# Altium PCB PCB_RIGHT_AV-RK MK II_2023-07-27.pcbdoc
Units mil, origin at the board's own origin, x right, y up, seen from the top; angles counter-clockwise.
Board outline 8365.53 x 6307.47 mil, 2 copper layers (Top Layer, Bottom Layer); 62 components, 57 nets, 291 pads, 114 vias.
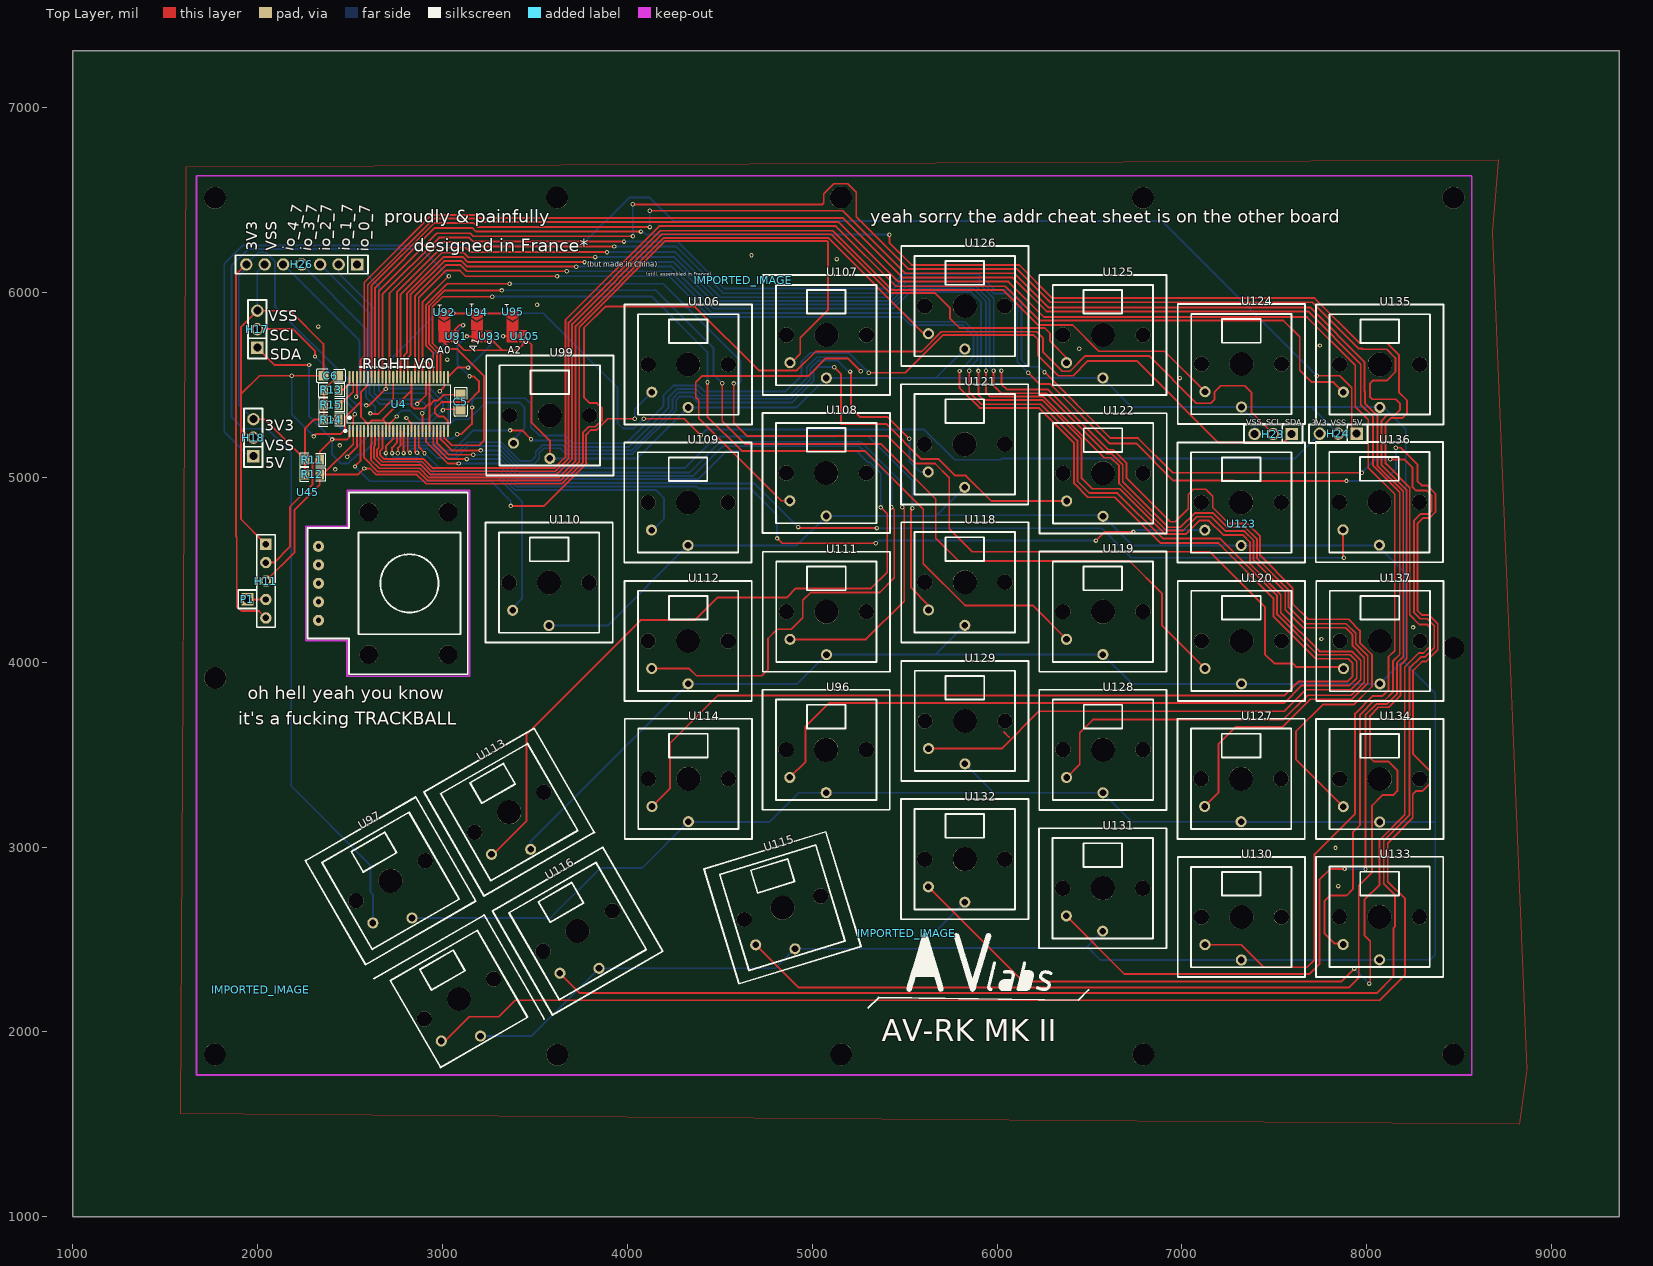
[diagram p0: Top Layer view]
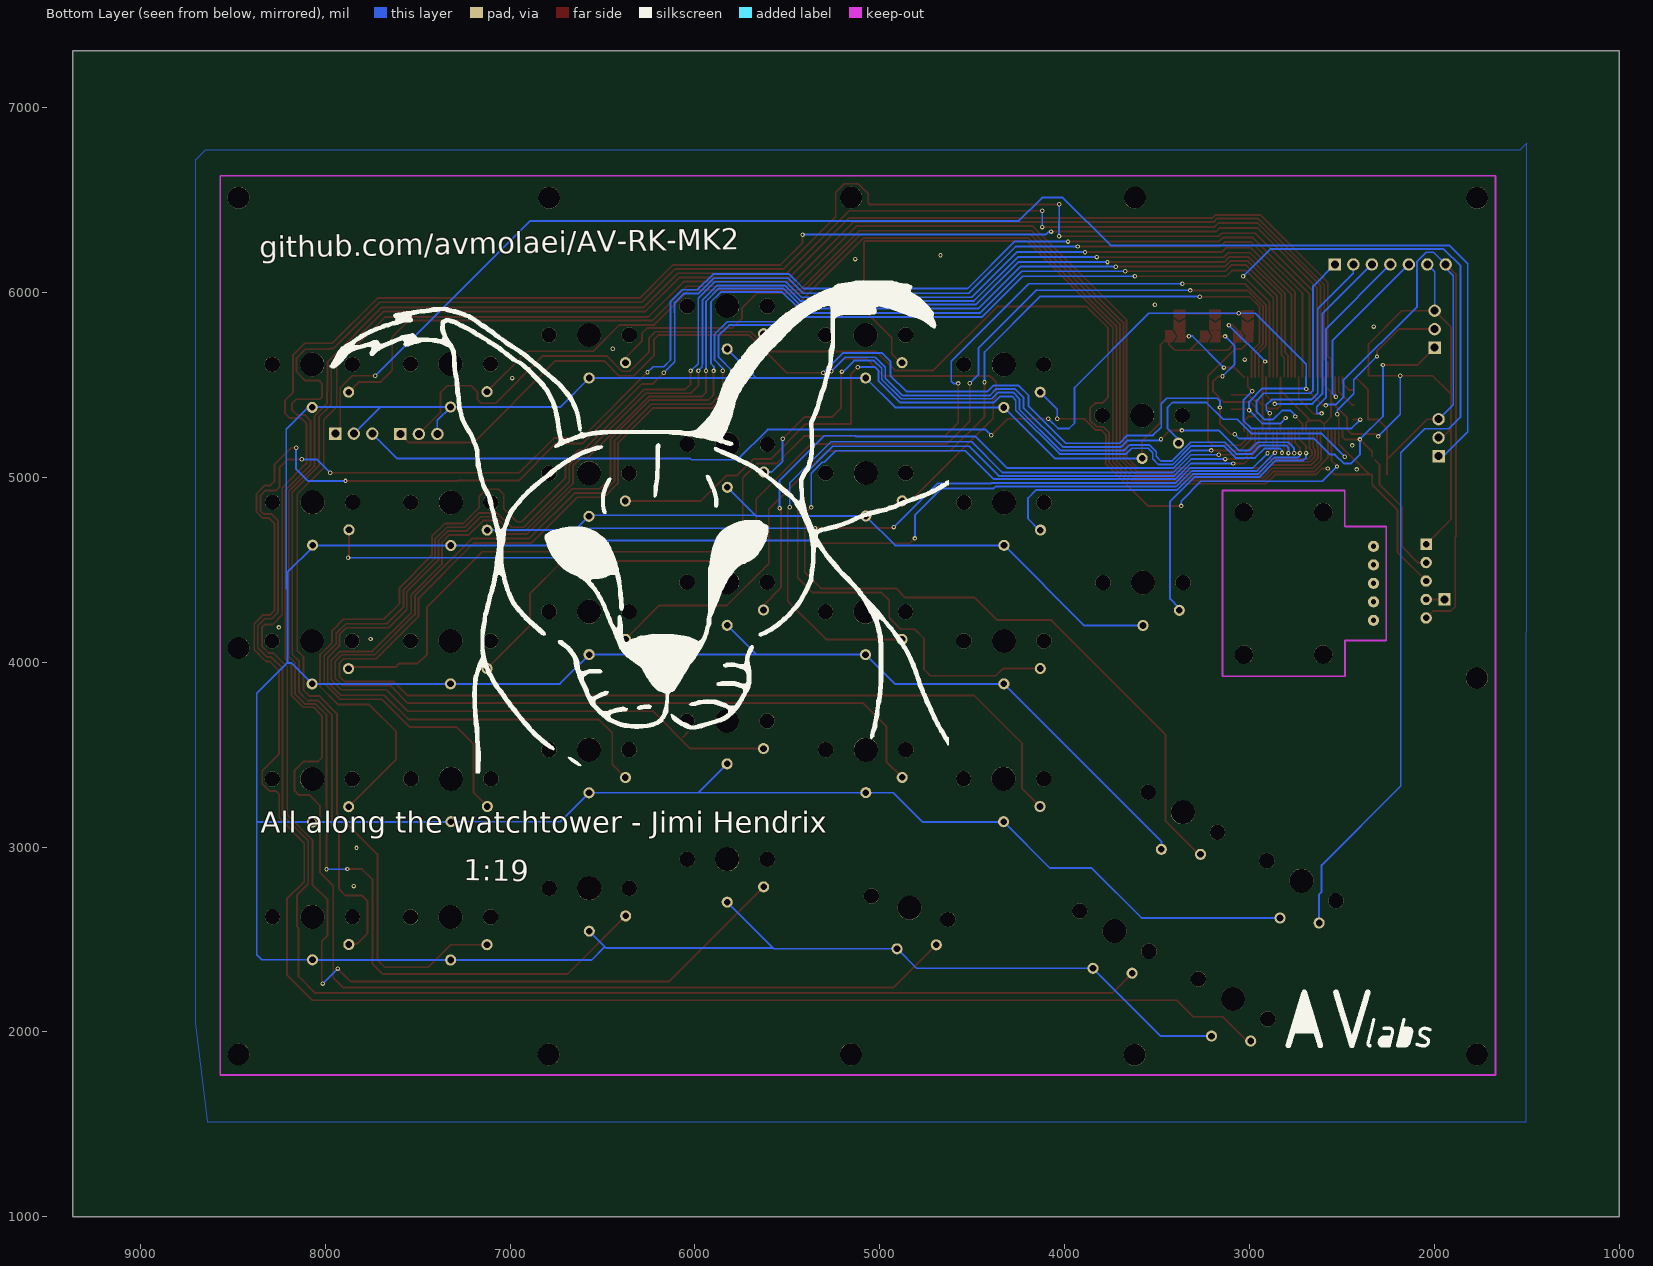
[diagram p1: Bottom Layer view, seen from below]

## Layer stack, top to bottom
Top Layer: signal copper (thickness not stored)
Dielectric: dielectric 12.6, FR-4, Dk 4.8
Bottom Layer: signal copper (thickness not stored)

## Board outline
9365.53,1000 1000,1000 1000,7307.47 9365.53,7307.47

## Components (designator, comment, footprint, x,y, rotation, side; value= is the part's Value field where it differs from the comment)
C5 "100nF" C0805 3097.83,5407.87 r90 top
C6 "100nF" C0805 2395.07,5549.99 r180 top
H11 "HDR-TH_5P-P2.54-V-M" HDR-TH_5P-P2.54-V-M 2044.29,4439.36 r270 top
H17 "I2C_POGO_L" HDR-TH_3P-P2.54-V-M 1997.83,5801.57 r90 top
H18 "PWR_POGO_L" HDR-TH_3P-P2.54-V-M 1976.57,5214.56 r90 top
H23 "I2C_POGO_R" HDR-TH_3P-P2.54-V-M 7493.88,5234.64 r180 top
H24 "PWR_POGO_R" HDR-TH_3P-P2.54-V-M 7845.85,5236.21 r180 top
H26 "X6511WV-07H-C30D60" HDR-TH_7P-P2.54-V-M 2237.99,6151.96 r180 top
IMPORTED_IMAGE "IMPORTED_IMAGE" IMPORTED_IMAGE 5510.35,2533.18 r0 top
IMPORTED_IMAGE "IMPORTED_IMAGE" IMPORTED_IMAGE 4627.38,6065.32 r0 top
IMPORTED_IMAGE "IMPORTED_IMAGE" IMPORTED_IMAGE 2015.55,2227.95 r0 top
P1 "HEADER MALE 2.54" HDR-TH_1P-P2.54-V-M 1944.68,4340.55 r0 top
R11 "4.7kΩ" R0805 2295.86,5095.66 r180 top
R12 "4.7kΩ" R0805 2295.86,5016.14 r180 top
R13 "1.1kΩ" R0805 2397.83,5473.22 r180 top
R14 "1.1kΩ" R0805 2398.22,5312.59 r180 top
R15 "2kΩ" R0805 2398.22,5391.72 r180 top
U4 "PCA9505DGG,118" TSSOP-56_L14.0-W6.1-P0.50-LS8.1-BL 2762.79,5396.84 r0 top
U45 "Pimoroni Trackball" PIMORONI_TRACKBALL_BASIC 2269.88,4918.89 r0 top
U91 "beautiful-solderbridge" BEAUTIFUL-SOLDER-BRIDGE 3075.39,5762.98 r0 top
U92 "beautiful-solderbridge" BEAUTIFUL-SOLDER-BRIDGE 3009.25,5892.9 r90 top
U93 "beautiful-solderbridge" BEAUTIFUL-SOLDER-BRIDGE 3254.91,5762.98 r0 top
U94 "beautiful-solderbridge" BEAUTIFUL-SOLDER-BRIDGE 3185.62,5894.09 r90 top
U95 "beautiful-solderbridge" BEAUTIFUL-SOLDER-BRIDGE 3378.93,5894.87 r90 top
U96 "TECLA KAILH CHOC BAJO PERFIL 1350 RGB COPY" "TECLA  KAILH CHOC BAJO PERFIL 1350 RGB" 5075.38,3526.37 r0 top
U97 "TECLA KAILH CHOC BAJO PERFIL 1350 RGB COPY" "TECLA  KAILH CHOC BAJO PERFIL 1350 RGB" 2718.7,2817.32 r30 top
U99 "TECLA KAILH CHOC BAJO PERFIL 1350 RGB COPY" "TECLA  KAILH CHOC BAJO PERFIL 1350 RGB" 3580.51,5335.03 r0 top
U105 "beautiful-solderbridge" BEAUTIFUL-SOLDER-BRIDGE 3443.89,5763.77 r0 top
U106 "TECLA KAILH CHOC BAJO PERFIL 1350 RGB COPY" "TECLA  KAILH CHOC BAJO PERFIL 1350 RGB" 4328.93,5610.62 r0 top
U107 "TECLA KAILH CHOC BAJO PERFIL 1350 RGB COPY" "TECLA  KAILH CHOC BAJO PERFIL 1350 RGB" 5076.56,5770.07 r0 top
U108 "TECLA KAILH CHOC BAJO PERFIL 1350 RGB COPY" "TECLA  KAILH CHOC BAJO PERFIL 1350 RGB" 5075.78,5023.22 r0 top
U109 "TECLA KAILH CHOC BAJO PERFIL 1350 RGB COPY" "TECLA  KAILH CHOC BAJO PERFIL 1350 RGB" 4327.75,4864.56 r0 top
U110 "TECLA KAILH CHOC BAJO PERFIL 1350 RGB COPY" "TECLA  KAILH CHOC BAJO PERFIL 1350 RGB" 3576.17,4430.7 r0 top
U111 "TECLA KAILH CHOC BAJO PERFIL 1350 RGB COPY" "TECLA  KAILH CHOC BAJO PERFIL 1350 RGB" 5076.96,4273.22 r0 top
U112 "TECLA KAILH CHOC BAJO PERFIL 1350 RGB COPY" "TECLA  KAILH CHOC BAJO PERFIL 1350 RGB" 4328.53,4115.35 r0 top
U113 "TECLA KAILH CHOC BAJO PERFIL 1350 RGB COPY" "TECLA  KAILH CHOC BAJO PERFIL 1350 RGB" 3360.43,3188.58 r30 top
U114 "TECLA KAILH CHOC BAJO PERFIL 1350 RGB COPY" "TECLA  KAILH CHOC BAJO PERFIL 1350 RGB" 4330.11,3369.29 r0 top
U115 "TECLA KAILH CHOC BAJO PERFIL 1350 RGB COPY" "TECLA  KAILH CHOC BAJO PERFIL 1350 RGB" 4838.77,2671.65 r17 top
U116 "TECLA KAILH CHOC BAJO PERFIL 1350 RGB COPY" "TECLA  KAILH CHOC BAJO PERFIL 1350 RGB" 3730.51,2545.27 r30 top
U118 "TECLA KAILH CHOC BAJO PERFIL 1350 RGB COPY" "TECLA  KAILH CHOC BAJO PERFIL 1350 RGB" 5825.78,4432.28 r0 top
U119 "TECLA KAILH CHOC BAJO PERFIL 1350 RGB COPY" "TECLA  KAILH CHOC BAJO PERFIL 1350 RGB" 6572.62,4273.62 r0 top
U120 "TECLA KAILH CHOC BAJO PERFIL 1350 RGB COPY" "TECLA  KAILH CHOC BAJO PERFIL 1350 RGB" 7322.23,4115.35 r0 top
U121 "TECLA KAILH CHOC BAJO PERFIL 1350 RGB COPY" "TECLA  KAILH CHOC BAJO PERFIL 1350 RGB" 5824.6,5178.73 r0 top
U122 "TECLA KAILH CHOC BAJO PERFIL 1350 RGB COPY" "TECLA  KAILH CHOC BAJO PERFIL 1350 RGB" 6573.41,5022.04 r0 top
U123 "TECLA KAILH CHOC BAJO PERFIL 1350 RGB COPY" "TECLA  KAILH CHOC BAJO PERFIL 1350 RGB" 7321.05,4864.17 r0 top
U124 "TECLA KAILH CHOC BAJO PERFIL 1350 RGB COPY" "TECLA  KAILH CHOC BAJO PERFIL 1350 RGB" 7322.23,5612.98 r0 top
U125 "TECLA KAILH CHOC BAJO PERFIL 1350 RGB COPY" "TECLA  KAILH CHOC BAJO PERFIL 1350 RGB" 6572.62,5770.07 r0 top
U126 "TECLA KAILH CHOC BAJO PERFIL 1350 RGB COPY" "TECLA  KAILH CHOC BAJO PERFIL 1350 RGB" 5825.78,5926.76 r0 top
U127 "TECLA KAILH CHOC BAJO PERFIL 1350 RGB COPY" "TECLA  KAILH CHOC BAJO PERFIL 1350 RGB" 7320.26,3369.29 r0 top
U128 "TECLA KAILH CHOC BAJO PERFIL 1350 RGB COPY" "TECLA  KAILH CHOC BAJO PERFIL 1350 RGB" 6573.02,3525.98 r0 top
U129 "TECLA KAILH CHOC BAJO PERFIL 1350 RGB COPY" "TECLA  KAILH CHOC BAJO PERFIL 1350 RGB" 5826.17,3682.28 r0 top
U130 "TECLA KAILH CHOC BAJO PERFIL 1350 RGB COPY" "TECLA  KAILH CHOC BAJO PERFIL 1350 RGB" 7321.84,2621.26 r0 top
U131 "TECLA KAILH CHOC BAJO PERFIL 1350 RGB COPY" "TECLA  KAILH CHOC BAJO PERFIL 1350 RGB" 6571.84,2777.16 r0 top
U132 "TECLA KAILH CHOC BAJO PERFIL 1350 RGB COPY" "TECLA  KAILH CHOC BAJO PERFIL 1350 RGB" 5825.38,2934.25 r0 top
U133 "TECLA KAILH CHOC BAJO PERFIL 1350 RGB COPY" "TECLA  KAILH CHOC BAJO PERFIL 1350 RGB" 8069.47,2622.44 r0 top
U134 "TECLA KAILH CHOC BAJO PERFIL 1350 RGB COPY" "TECLA  KAILH CHOC BAJO PERFIL 1350 RGB" 8070.26,3367.71 r0 top
U135 "TECLA KAILH CHOC BAJO PERFIL 1350 RGB COPY" "TECLA  KAILH CHOC BAJO PERFIL 1350 RGB" 8070.65,5611.02 r0 top
U136 "TECLA KAILH CHOC BAJO PERFIL 1350 RGB COPY" "TECLA  KAILH CHOC BAJO PERFIL 1350 RGB" 8068.69,4865.74 r0 top
U137 "TECLA KAILH CHOC BAJO PERFIL 1350 RGB COPY" "TECLA  KAILH CHOC BAJO PERFIL 1350 RGB" 8071.44,4114.95 r0 top
? "" ? 3017.93,4772.15 r0 top
? "" ? 2841.61,4731.82 r0 top
? "" ? 2336.15,4145.12 r0 top

## Footprints (in the part's own frame and the unit in brackets; to place one, negate y for a bottom-side part, rotate by r counter-clockwise, add the part's x,y. Pads: shape width x height; smd on the part's side, far side on the other; paste and mask are expansions set on the pad)
BEAUTIFUL-SOLDER-BRIDGE [mil]
  Top Layer region: -96.46,31.5 -37.4,31.5 -57.09,0 -37.4,-31.5 -96.46,-31.5
  Top Layer region: -47.24,0 -27.56,31.5 11.81,31.5 11.81,-31.5 -27.56,-31.5
C0805 [mm]
  rect 1.41x1.35 smd paste-100 mask+0.051: 1(-1,0) 2(1,0)
  silkscreen extent -1.96,-0.9 1.96,0.9
HDR-TH_1P-P2.54-V-M [mm]
  rect 1.7x1.7 hole 1.1 paste+0 mask+0.051: 1(0,0)
  silkscreen extent -1.27,-1.27 1.27,1.27
HDR-TH_3P-P2.54-V-M [mm]
  rect 1.7x1.7 hole 1.1 paste+0 mask+0.051: 1(-2.54,0)
  round 1.7 hole 1.1 paste+0 mask+0.051: 2(0,0) 3(2.54,0)
  silkscreen extent -4.02,-1.27 4.02,1.27
HDR-TH_5P-P2.54-V-M [mil]
  rect 62x62 hole 35 paste+0 mask+2: 1(-200,0)
  round 62 hole 35 paste+0 mask+2: 2(-100,0) 3(0,0) 4(100,0) 5(200,0)
  silkscreen extent -250,-50 250,50
HDR-TH_7P-P2.54-V-M [mm]
  rect 1.7x1.7 hole 1.1 paste+0 mask+0.051: 1(-7.62,0)
  round 1.7 hole 1.1 paste+0 mask+0.051: 2(-5.08,0) 3(-2.54,0) 4(0,0) 5(2.54,0) 6(5.08,0) 7(7.62,0)
  silkscreen extent -9.1,-1.27 9.1,1.27
IMPORTED_IMAGE [mil]
  silkscreen extent 0,-315 787,0
PIMORONI_TRACKBALL_BASIC [mil]
R0805 [mil]
  rect 44.59x54.21 smd paste-3937.01 mask+2: 1(-39.37,0) 2(39.37,0)
  silkscreen extent -69,-36 69,36
"TECLA  KAILH CHOC BAJO PERFIL 1350 RGB" [mil]
  round 60 hole 36 paste+0 mask+2: 1(-196.85,-149.65) 2(0,-232.32)
  round 82.68 hole 82.68 unplated paste+0: ""(-216.53,-0.04) ""(216.54,-0.04)
  round 129.92 hole 129.92 unplated paste+0: ""(0,0)
  silkscreen extent -344,-325 344,325
TSSOP-56_L14.0-W6.1-P0.50-LS8.1-BL [mm]
  oval 0.28x1.7 smd paste+0 mask+0.051: 1(-6.75,-3.7) 2(-6.25,-3.7) 3(-5.75,-3.7) 4(-5.25,-3.7) 5(-4.75,-3.7) 6(-4.25,-3.7) 7(-3.75,-3.7) 8(-3.25,-3.7) 9(-2.75,-3.7) 10(-2.25,-3.7) 11(-1.75,-3.7) 12(-1.25,-3.7) 13(-0.75,-3.7) 14(-0.25,-3.7) 15(0.25,-3.7) 16(0.75,-3.7) 17(1.25,-3.7) 18(1.75,-3.7) 19(2.25,-3.7) 20(2.75,-3.7) 21(3.25,-3.7) 22(3.75,-3.7) 23(4.25,-3.7) 24(4.75,-3.7) 25(5.25,-3.7) 26(5.75,-3.7) 27(6.25,-3.7) 28(6.75,-3.7) 29(6.75,3.7) 30(6.25,3.7) 31(5.75,3.7) 32(5.25,3.7) 33(4.75,3.7) 34(4.25,3.7) 35(3.75,3.7) 36(3.25,3.7) 37(2.75,3.7) 38(2.25,3.7) 39(1.75,3.7) 40(1.25,3.7) 41(0.75,3.7) 42(0.25,3.7) 43(-0.25,3.7) 44(-0.75,3.7) 45(-1.25,3.7) 46(-1.75,3.7) 47(-2.25,3.7) 48(-2.75,3.7) 49(-3.25,3.7) 50(-3.75,3.7) 51(-4.25,3.7) 52(-4.75,3.7) 53(-5.25,3.7) 54(-5.75,3.7) 55(-6.25,3.7) 56(-6.75,3.7)
  silkscreen extent -7.49,-3.85 7.08,2.62
? [mil]

## Free pads (board coordinates)
  round 60 hole 28.74 paste+0 mask+2: 1(2328.93,4626.77) 2(2328.93,4526.77) 3(2328.93,4426.77) 4(2328.93,4326.77) 5(2328.93,4226.77)
  round 60 hole 36 paste+0 mask+2: 1(2993.12,1950.32) 2(3204.94,1977.15)
  round 118.11 hole 118.11 unplated paste+0: ""(1768.7,1877.95) ""(1768.7,6512.59) ""(1770.28,3914.56) ""(3619.88,6513.37) ""(3621.06,1875.98) ""(5154.92,6514.16) ""(5156.49,1877.95) ""(6789.56,6512.98) ""(6791.53,1877.56) ""(8468.69,4076.76) ""(8469.08,1878.35) ""(8469.48,6512.98)
  round 100 hole 100 unplated paste+0: ""(2600.59,4040.94) ""(2600.59,4812.59) ""(3029.72,4040.94) ""(3029.72,4812.59)
  round 82.68 hole 82.68 unplated paste+0: ""(2901.27,2070.05) ""(3276.32,2286.58)
  round 129.92 hole 129.92 unplated paste+0: ""(3088.77,2178.34)

## Via types
v1: diameter 23.98, hole 12.01, Top Layer to Bottom Layer, tented both sides, 114 vias

## Nets (pads, with @x,y where several pads share a name; then routed paths per layer and width w, separated by ;. In a path a pad name is that pad's centre, name@x,y a point inside that pad or via, vN(x,y) a via of type N, cw(c..) or ccw(c..) an arc to the next point about the centre after c; other vN are vias at no path point)
5V_MCU: H18.1 H24.1 | length 8055.2
  Top Layer w10: v1(7729.71,5549.99) 7854.9,5549.99 7919.08,5485.82 7919.08,5262.98 H24.1
  Bottom Layer w10: H18.1 1952.21,5114.55 1819.11,5247.65 1819.11,6155.85 1917.91,6254.75 3751.41,6254.75 4010.01,6513.35 4121.41,6513.35 4247.01,6387.75 6891.91,6387.75 v1(7729.71,5549.99)
A0: U4.27 | length 1052.9
  Top Layer w10: U4.27@3008.81,5251.15 3008.81,5214.55 3049.71,5173.65 3198.71,5173.65 3223.81,5198.75 3223.81,5273.15 ; 3009.21,5825.95 3008.51,5762.95 3008.51,5729.55 3043.91,5694.05 3078.51,5694.05 3223.81,5548.85 3223.81,5235.85
A1: U4.28 | length 945.8
  Top Layer w10: U4.28 3028.54,5306.68 3006.49,5328.73 2978.93,5328.73 2958.07,5349.6 2958.07,5371.25 2994.68,5407.87 3139.56,5407.87 3196.61,5464.91 3196.61,5520.9 3171.84,5545.66 3147.5,5545.66 v1(3145.91,5547.25) ; v1(3131.69,5762.98) 3187.98,5762.98 3185.62,5765.34 3185.62,5827.15
  Bottom Layer w10: v1(3131.69,5762.98) 3080.51,5711.8 3080.51,5612.65 v1(3145.91,5547.25)
A2: U4.29 | length 505.4
  Top Layer w10: U4.29 3080.11,5594.09 v1(3137.99,5594.09) ; v1@3327.75,5764.16 3328.14,5763.77 3376.96,5763.77 3378.93,5765.74 3378.93,5827.94
  Bottom Layer w10: v1(3137.99,5594.09) 3308.06,5764.16 v1@3327.75,5764.16
  other v1: 3327.75,5764.16
INT_PCA: R15.1 U4.55 | length 187.7
  Top Layer w10: R15.1 2444.68,5391.72 2516.72,5463.77 U4.55
IO_0_0: U4.3 U99.1 | length 1471.7
  Top Layer w10: v1(2484.05,5111.8) 2536.41,5164.16 U4.3
  Bottom Layer w10: v1(2484.05,5111.8) 2610.4,5238.15 2991.1,5238.15 3067.12,5314.16 3142.32,5314.16 3233.26,5405.11 3417.12,5405.11 3444.28,5377.94 3444.28,5265.35 3383.65,5204.72 U99.1
IO_0_1: U4.4 U106.1 | length 2296.3
  Top Layer w10: v1(2526.18,5059.05) 2556.1,5088.97 U4.4 ; v1(3369.09,4845.66) 3550.61,4845.65 3780.51,5075.55 3775.41,5080.65 3775.41,5229.15 3802.51,5256.25 3832.51,5256.25 3893.91,5316.95 v1@4039.61,5316.95
  Bottom Layer w10: v1(2526.18,5059.05) 2606.49,4978.73 3262.39,4978.73 3369.09,4872.04 v1(3369.09,4845.66) ; v1(4039.56,5316.92) 4039.56,5368.45 U106.1
IO_0_2: U4.5 U107.1 | length 4415.2
  Top Layer w10: U4.5 2575.81,5106.25 2650.61,5031.45 2871.21,5031.45 2920.41,4982.25 3636.41,4982.25 3739.21,5085.05 3739.21,5812.95 4205.31,6279.15 5079.51,6279.15 5086.01,6272.55 5086.01,5906.65 4935.21,5755.85 4935.21,5667.75 4887.91,5620.45 U107.1@4879.71,5620.45
IO_0_3: U4.7 U126.1 | length 4393.3
  Top Layer w10: U4.7 2615.15,5177.55 2612,5174.4 2612,5094.09 2656.89,5049.2 2876.18,5049.2 2926.18,4999.2 3629.72,4999.2 3719.88,5089.36 3719.88,5818.1 4197.43,6295.66 5085.62,6295.66 5604.17,5777.11 U126.1
IO_0_4: U4.8 U125.1 | length 5260
  Top Layer w10: U4.8 2635.21,5172.85 2628.51,5166.15 2628.51,5106.25 2668.71,5066.15 2884.21,5066.15 2934.21,5016.15 3617.11,5016.15 3700.61,5099.55 3700.61,5829.55 4186.81,6315.75 5103.71,6315.75 5422.61,5996.85 5665.11,5996.85 5744.71,5917.35 5744.71,5860.65 5797.01,5808.25 6257.31,5808.25 6287.21,5778.35 6287.21,5736.25 6375.81,5647.55 U125.1@6375.81,5620.45
IO_0_5: U4.9 U124.1 | length 5984.6
  Top Layer w10: U4.9 2654.51,5160.25 2644.71,5150.35 2644.71,5113.35 2673.81,5084.25 2888.81,5084.25 2939.61,5033.45 3610.81,5033.45 3681.71,5104.35 3681.71,5837.35 4178.51,6334.25 5112.01,6334.25 5433.31,6012.95 6032.91,6012.95 6220.61,5825.15 6408.11,5825.15 6550.61,5682.65 6906.01,5682.65 U124.1@7125.41,5463.35
IO_0_6: U4.10 U135.1 | length 6831.4
  Top Layer w10: U4.10 2674.21,5155.55 2662.01,5143.25 2662.01,5120.85 2682.51,5100.35 2896.21,5100.35 2946.21,5050.35 3604.51,5050.35 3665.11,5111.05 3665.11,5852.75 4171.81,6359.45 5128.11,6359.45 5453.31,6034.25 6045.11,6034.25 6230.91,5848.45 7549.81,5848.45 7637.61,5760.65 7637.61,5579.15 7701.41,5515.35 7819.81,5515.35 U135.1
IO_0_7: H26.1 U4.12 | length 1477.4
  Top Layer w10: U4.12 2713.58,5291.33 v1(2751.77,5329.52)
  Bottom Layer w10: H26.1 2655.31,6034.64 2655.31,5470.45 2670.61,5455.15 2921.41,5455.15 2961.21,5415.35 2961.21,5355.15 2918.31,5312.15 2916.71,5313.75 2871.11,5313.75 2823.81,5361.05 2777.01,5361.05 2751.81,5335.85 v1@2751.81,5329.55
IO_1_0: U4.13 U110.1 | length 1603.7
  Top Layer w10: v1(2693.5,5131.49) 2693.51,5169.25 2733.31,5209.05 U4.13
  Bottom Layer w10: v1(2693.5,5131.49) 2693.51,5107.05 2708.91,5091.75 2856.51,5091.75 2946.61,5001.55 3297.41,5001.55 3428.91,4870.05 3428.91,4342.15 3379.31,4292.55 U110.1
IO_1_1: U4.14 U109.1 | length 1915.2
  Top Layer w10: v1(2726.96,5131.49) 2726.96,5161.02 2752.95,5187 U4.14@2752.95,5251.17
  Bottom Layer w10: v1(2726.96,5131.49) 2726.21,5118.45 2736.81,5107.85 2864.41,5107.85 2954.51,5017.75 3305.31,5017.75 3390.41,4932.65 4153.31,4932.65 4198.21,4887.75 4198.21,4776.35 4136.81,4714.95 U109.1@4130.91,4714.95
IO_1_2: U4.15 U108.1 | length 4952.6
  Top Layer w10: v1(2758.07,5131.1) 2758.07,5158.66 2772.63,5173.22 U4.15 ; v1(3365.51,5253.95) 3431.27,5253.95 v1(3478.54,5206.69) ; U108.1 4832.52,4873.57 4386.41,5319.68 4386.41,5416.92 4370.27,5433.06 4370.27,5514.56 4403.34,5547.63 4977.35,5547.63 5073.81,5644.09 5192.77,5644.09 v1(5262.81,5574.05)
  Bottom Layer w10: v1(2758.07,5131.1) 2758.11,5158.65 2789.21,5189.75 2954.51,5189.75 2998.21,5146.05 3057.71,5146.05 3165.51,5253.95 v1(3365.51,5253.95) ; v1(3478.54,5206.69) 3485.21,5199.95 3658.81,5199.95 3693.91,5164.95 4010.01,5164.95 4223.01,5377.95 4223.01,5432.65 4270.71,5478.75 4368.71,5478.75 4403.71,5443.65 4877.71,5443.65 4970.71,5536.65 4970.71,5595.65 5025.01,5649.95 5186.81,5649.95 v1(5262.81,5574.05)
IO_1_3: U4.16 U121.1 | length 3910.2
  Top Layer w10: v1(2789.17,5131.49) 2789.17,5248.02 U4.16 ; v1@5204.91,5572.45 5209.21,5568.05 5209.21,5377.55 5260.41,5326.35 5407.67,5327.16 ; 5374.49,5326.35 5407.69,5326.35 v1(5525.38,5208.65)
  Bottom Layer w10: v1(2789.17,5131.49) 2789.21,5161.45 2801.01,5173.25 2940.71,5173.25 2987.61,5126.35 3068.71,5126.35 3132.51,5190.15 3317.51,5190.15 3419.91,5087.75 3478.51,5087.75 3504.11,5113.35 3504.11,5138.55 3541.11,5175.55 3647.01,5175.55 3677.01,5145.65 4023.01,5145.65 4244.71,5367.35 4244.71,5425.55 4278.51,5459.45 4359.61,5459.45 4393.91,5425.15 4884.81,5425.15 4989.21,5529.55 4989.21,5589.35 5031.71,5631.85 5138.81,5631.85 5198.21,5572.45 v1@5204.91,5572.45 ; v1(5525.38,5208.65) 5525.81,5087.35 5584.11,5029.05 U121.1
  other v1: 5204.91,5572.43
IO_1_4: U4.17 U122.1 | length 4598.7
  Top Layer w10: U4.17 2812,5144.09 v1(2823.81,5132.28) ; v1@5119.11,5596.45 5156.51,5559.05 5156.51,5288.15 5402.11,5288.15 5591.11,5099.25 5684.41,5099.25 5773.81,5009.85 5831.31,5009.85 5968.71,4872.35 U122.1
  Bottom Layer w10: v1(2823.81,5132.28) 2823.81,5146.05 2834.81,5157.05 2918.01,5157.05 2969.91,5105.15 3074.61,5105.15 3139.51,5170.05 3314.81,5170.05 3415.21,5069.65 3492.71,5069.65 3523.01,5099.95 3523.01,5133.85 3547.01,5157.85 3636.41,5157.85 3667.11,5127.15 4027.31,5127.15 4264.41,5364.15 4264.41,5417.75 4284.41,5437.75 4348.61,5437.75 4380.81,5405.55 4891.11,5405.55 5007.31,5521.65 5007.31,5579.15 5024.61,5596.45 v1@5119.11,5596.45
  other v1: 5119.09,5596.45
IO_1_5: U4.19 U123.1 | length 4696.9
  Top Layer w10: U4.19 2851.37,5133.46 v1(2862,5133.46) ; v1(4810.03,4670.07) 4836.8,4643.3 v1(5344.28,4643.3) ; v1(6534.83,4657.87) 6581.68,4704.72 v1(6737.59,4704.72)
  Bottom Layer w10: v1(2862,5133.46) 2960.81,5034.65 3312.41,5034.65 3396.21,4950.75 4373.01,4950.75 4383.61,4940.15 4665.91,4940.15 4810.01,4796.05 v1(4810.03,4670.07) ; v1(5344.28,4643.3) 5358.85,4657.87 v1(6534.83,4657.87) ; v1(6737.59,4704.72) 6747.38,4714.52 U123.1
IO_1_6: U4.20 U136.1 | length 5494.6
  Top Layer w10: U4.20 2871.05,5165.35 2902.16,5134.25 v1(2902.16,5130.7) ; v1(4925.01,4731.05) 4930.47,4725.58 v1(5350.19,4725.58) ; U136.1 7871.84,4570.42 v1(7876.91,4565.35)
  Bottom Layer w10: v1(2902.16,5130.7) 2982.08,5050.78 3319.09,5050.78 3399.4,4970.47 4393.89,4970.47 4396.65,4967.71 4687.59,4967.71 v1(4925.01,4731.05) ; v1(5350.19,4725.58) 6565.91,4725.15 6725.81,4565.35 v1(7876.91,4565.35)
IO_1_7: H26.2 U4.21 | length 1230
  Top Layer w10: v1(2889.95,5347.24) 2890.74,5346.45 U4.21
  Bottom Layer w10: H26.2 2437.99,6105.11 2630.51,5912.59 2630.51,5455.45 2665.21,5420.85 2880.51,5420.85 2908.81,5392.55 2908.81,5366.05 v1@2890.01,5347.25
IO_2_0: U4.22 U113.1 | length 6314.4
  Top Layer w10: U4.22 2910.43,5192.83 3028.06,5075.19 v1(3087.59,5075.19) ; U113.1 3273.34,2960.55 3454.52,3141.73 3454.52,3610.62 4071.45,4227.55 4363.57,4227.55 4486.02,4349.99 4861.21,4349.99 4910.82,4399.6 5317.9,4399.6 5405.7,4487.4 5405.7,4802.36 v1(5370.66,4837.4)
  Bottom Layer w10: v1(3087.59,5075.19) 3317.51,5075.15 3401.81,4990.95 4383.61,4990.95 4537.21,5144.45 5238.81,5144.45 5301.41,5081.85 5312.01,5081.85 5370.71,5023.25 v1(5370.66,4837.4)
IO_2_1: U4.24 U112.1 | length 5004.2
  Top Layer w10: U4.24 2949.8,5179.16 3029.76,5099.2 v1(3131.29,5099.2) ; U112.1 4334.48,3965.7 4373.81,3926.37 4725.78,3926.37 4760.82,3961.41 4760.82,4128.34 4811.21,4178.73 4886.01,4178.73 4948.61,4241.33 4948.61,4334.64 4991.13,4377.16 5364.75,4377.16 5443.49,4455.9 5443.49,4824.4 v1(5428.93,4838.97)
  Bottom Layer w10: v1@3131.31,5099.25 3316.31,5099.25 3407.31,5008.25 4357.31,5008.25 4517.11,5168.15 5254.51,5168.15 5428.91,4993.65 v1(5428.93,4838.97)
IO_2_2: U4.25 U111.1 | length 4161.4
  Top Layer w10: U4.25 2969.48,5186.98 3034.03,5122.43 v1(3165.55,5122.43) ; U111.1 5290.69,4123.57 5497.82,4330.7 5497.82,4827.48 v1(5486.8,4838.51)
  Bottom Layer w10: v1@3165.51,5122.45 3316.31,5122.45 3412.41,5026.35 4336.81,5026.35 4502.91,5192.55 5264.01,5192.55 5486.81,4969.65 v1@5486.81,4833.45
IO_2_3: U4.26 U118.1 | length 3578.5
  Top Layer w10: U4.26 2989.16,5205.9 3049.01,5146.05 v1(3206.1,5146.06) ; v1(5541.91,4833.05) 5534.83,4825.98 5534.83,4403.14 5628.93,4309.05 U118.1
  Bottom Layer w10: v1(3206.1,5146.06) 3315.91,5146.05 3412.01,5049.95 4310.81,5049.95 4482.91,5222.05 5128.91,5222.05 5132.11,5225.15 5301.01,5225.15 5541.91,4984.25 v1(5541.91,4833.05)
IO_2_4: U4.31 U119.1 | length 4998.1
  Top Layer w10: U4.31 2989.17,5683.46 2945.47,5727.16 2945.47,5922.82 2999.8,5977.15 v1(3268.3,5977.16) ; v1(4433.26,5514.95) 4433.26,5329.13 4619.09,5143.3 5285.66,5143.3 5601.01,4827.95 5601.01,4533.05 5826.61,4307.45 6192.31,4307.45 U119.1
  Bottom Layer w10: v1(3268.3,5977.16) 3270.66,5979.52 4132.08,5979.52 4433.26,5678.34 v1(4433.26,5514.95)
IO_2_5: U4.32 U120.1 | length 5913.7
  Top Layer w10: U4.32 2969.48,5678.38 2927.01,5720.85 2927.01,5927.15 3011.21,6011.45 v1(3320.66,6011.41) ; v1@4513.58,5509.05 4513.58,5303.54 4636.02,5181.1 5370.61,5181.1 5668.71,4882.99 5668.71,4670.85 5791.9,4547.65 6716.7,4547.65 6891.9,4372.45 6891.9,4199.15 U120.1
  Bottom Layer w10: v1(3320.66,6011.41) 4152.94,6012.98 4465.15,5700.78 4465.15,5557.48 v1@4513.58,5509.05
  other v1: 4513.57,5509.05
IO_2_6: U4.33 U137.1 | length 6860.9
  Top Layer w10: U4.33 2949.8,5674.4 2910.82,5713.38 2910.82,5933.85 3024.99,6048.02 v1@3367.91,6048.02 ; v1(4575.78,5508.65) 4575.78,5296.48 4648.6,5223.65 5409.6,5223.65 5558.11,5075.15 5664.4,5075.15 5741.1,4998.45 5741.1,4722.45 5865.9,4597.25 7151.81,4597.25 7449.4,4299.55 7449.4,4044.05 7501.41,3992.15 7601.41,3992.15 7619.91,3973.65 7866.3,3973.65 U137.1@7874.6,3965.35
  Bottom Layer w10: v1(3362.69,6048.05) 4194.68,6048.02 4613.18,5629.52 4613.18,5520.46 4601.37,5508.65 v1(4575.78,5508.65)
IO_2_7: H26.3 U4.35 | length 1256.6
  Top Layer w10: v1(2863.18,5397.24) 2910.43,5444.47 U4.35
  Bottom Layer w10: H26.3 2604.91,5885.04 2604.91,5451.55 2659.21,5397.25 v1@2863.21,5397.25
IO_3_0: U4.36 U97.1 | length 5836.1
  Top Layer w10: U4.36 2890.74,5948.01 3034.84,6092.12 v1@3037.6,6089.35
  Bottom Layer w10: U97.1 2623.04,2743.68 2609.25,2757.48 2609.25,2902.36 2181.3,3330.31 2181.3,5133.46 2051.37,5263.38 1922.24,5263.38 1857.67,5327.94 1857.67,6144.09 1949.01,6235.42 2887.53,6235.42 v1(3034.41,6088.55)
IO_3_1: U4.37 U114.1 | length 11176.5
  Top Layer w10: U4.37 2871.06,5971.25 3018.3,6118.49 3094.28,6118.49 3124.2,6088.57 v1@3621.05,6088.57 ; U114.1@4133.31,3219.65 4230.11,3316.45 4230.11,3560.25 4490.31,3820.45 7556.91,3820.45 7632.91,3896.45 7897.03,3896.45 7923.8,3923.22 7923.8,3994.88 7899.79,4018.89 7725.38,4018.89 7495.46,4248.81 7495.46,4347.24 7198.21,4644.48 6884.83,4644.48 6636.4,4892.91 6491.92,4892.91 6417.11,4967.71 6417.11,5183.46 6224.99,5375.58 5905.3,5375.58 5797.43,5483.45 v1(5797.43,5575.58)
  Bottom Layer w10: v1(3619.88,6088.57) 4226.57,6088.57 4446.65,5868.49 5487.59,5868.49 5532.08,5824.01 5815.15,5824.01 5873.41,5765.74 5873.41,5651.57 v1(5797.43,5575.58)
IO_3_2: U4.38 U96.1 | length 10417.6
  Top Layer w10: U4.38 2851.37,5983.11 3017.11,6148.85 3098.21,6148.85 3131.72,6115.34 v1(3671.84,6115.35) ; U96.1@4878.51,3376.75 4964,3462.15 4964,3653.15 5089.91,3779.15 7552.91,3779.15 7648.6,3874.75 7906.9,3874.75 7945.81,3913.75 7945.81,4004.35 7910.01,4040.15 7733.6,4040.15 7515.11,4258.65 7515.11,4360.25 7205.71,4669.65 6896.21,4669.65 6651.01,4914.95 6500.2,4914.95 6434.81,4980.35 6434.81,5198.85 6237.61,5396.05 5915.11,5396.05 5849.8,5461.36 v1(5849.79,5576.37)
  Bottom Layer w10: v1@3671.81,6115.35 4231.71,6115.35 4458.51,5888.55 5499.01,5888.55 5545.51,5842.15 5825.81,5842.15 5894.31,5773.65 5894.31,5635.85 5849.81,5591.35 v1(5849.79,5576.37)
IO_3_3: U4.40 U129.1 | length 9863.7
  Top Layer w10: U4.40 2812,5646.84 2826.21,5661.05 2826.21,5988.55 3008.11,6170.45 3103.31,6170.45 3133.71,6140.15 v1@3724.61,6140.15 ; U129.1@5629.31,3532.65 6024.91,3532.65 6228.91,3736.65 6230.9,3734.65 7554.91,3734.65 7671.01,3850.75 7912.41,3850.75 7967.51,3905.85 7967.51,4011.05 7919.91,4058.65 7745.11,4058.65 7535.2,4268.45 7535.2,4364.95 7368.71,4531.45 7368.71,4649.95 7328.51,4688.55 7223.8,4688.55 7145.81,4766.53 7093.88,4766.53 7020.26,4692.91 6909.63,4692.91 6664.36,4938.18 6513.97,4938.18 6457.27,4994.88 6457.27,5205.9 6244.28,5418.89 5926.56,5418.89 5899.4,5446.06 v1(5899.4,5575.98)
  Bottom Layer w10: v1(3723.01,6140.15) 4239.61,6140.15 4465.11,5914.55 5439.61,5914.55 5527.71,6002.75 5860.81,6002.75 5913.21,5950.35 5913.21,5614.55 5897.81,5599.25 5897.81,5577.55 v1(5899.4,5575.98)
IO_3_4: U4.41 U128.1 | length 9308.5
  Top Layer w10: U4.41 2792.32,5661.02 2808.46,5677.16 2808.46,5995.66 3005.7,6192.9 3109.24,6192.9 3137.2,6164.95 v1(3767.91,6164.95) ; v1(5940.34,5576.76) 5940.35,5459.01 5962.41,5436.95 6250.2,5436.95 6580.9,5106.25 6615.51,5106.25 6660.01,5061.85 6660.01,4966.95 6914.31,4712.55 7006.1,4712.55 7080.9,4787.35 7158.11,4787.35 7236.41,4709.05 7338.01,4709.05 7388.4,4658.65 7388.4,4551.55 7559.2,4380.75 7559.2,4284.25 7657.31,4186.25 7886.81,4186.25 7923.8,4149.25 7923.8,4088.15 7986.81,4025.15 7986.81,3891.35 7916.7,3821.25 7680.51,3821.25 7549.4,3690.15 6519.51,3690.15 6447.41,3618.15 6447.41,3447.55 U128.1@6376.21,3376.35
  Bottom Layer w10: v1(3767.91,6164.95) 4249.81,6164.55 4478.11,5936.25 5435.61,5936.25 5521.81,6022.45 5870.61,6022.45 5940.31,5952.75 v1(5940.34,5576.76)
IO_3_5: U4.42 U127.1 | length 8732.9
  Top Layer w10: U4.42@2772.61,5542.55 2772.61,5990.55 2997.01,6214.95 3115.51,6214.95 3139.61,6190.95 3826.18,6190.95 v1(3826.17,6192.12) ; v1(5981.29,5577.16) 5981.29,5496.06 6022.23,5455.11 6265.93,5455.11 6593.1,5127.94 6620.21,5127.94 6680.11,5068.15 6680.11,4977.15 6927.31,4729.95 6992.31,4729.95 7072.21,4808.25 7166.7,4808.25 7245.11,4729.95 7341.5,4729.95 7407.31,4664.15 7407.31,4561.05 7576.21,4392.15 7576.21,4299.25 7667.1,4208.25 7888.01,4208.25 7940.31,4155.85 7940.31,4099.25 8005.31,4034.25 8005.31,3885.05 7919.51,3799.25 7695.11,3799.25 7545.51,3649.65 7291.9,3649.65 7197.41,3555.15 7197.41,3293.65 U127.1@7123.4,3219.65
  Bottom Layer w10: v1(3826.17,6192.12) 4252.95,6192.11 4490.35,5954.71 5430.5,5954.71 5514.75,6038.97 5880.5,6038.97 5958.45,5961.01 5958.45,5615.74 5960.42,5613.77 5960.42,5598.02 v1(5981.29,5577.16)
IO_3_6: U4.43 U134.1 | length 8685.2
  Top Layer w10: U4.43@2752.91,5542.55 2752.91,6001.95 2993.51,6242.55 3126.61,6242.55 3150.67,6218.49 v1(3889.56,6218.49) ; v1(6023.81,5576.37) 6023.81,5504.32 6052.15,5475.98 6274.99,5475.98 6601.36,5149.6 6627.74,5149.6 6700.58,5076.77 6700.58,4995.27 6936.01,4759.84 6963.57,4759.84 7034.04,4830.31 7034.04,4907.47 7061.99,4935.43 7128.92,4935.43 7166.72,4897.63 7166.72,4837 7253.33,4750.39 7353.33,4750.39 7423.41,4680.31 7423.41,4577.55 7598.21,4402.75 7598.21,4317.71 7683.25,4232.67 7901.76,4232.67 7963.17,4171.26 7963.17,4106.29 8028.53,4040.94 8028.53,3868.5 7932.07,3772.04 7763.96,3772.04 7617.11,3625.19 7617.11,3474.36 U134.1
  Bottom Layer w10: v1(3889.56,6218.49) 4259.16,6218.49 4503.31,5974.35 5423.4,5974.35 5507.7,6058.65 5891.9,6058.65 5982.1,5968.45 5982.1,5615.75 6021.41,5576.35 v1(6023.81,5576.37)
IO_3_7: H26.4 U4.44 | length 1275.3
  Top Layer w10: v1(2609.64,5346.06) 2609.64,5342.9 2650.98,5342.9 2733.26,5425.18 U4.44
  Bottom Layer w10: H26.4 2585.61,5804.35 2585.61,5432.65 2636.01,5382.25 2636.01,5346.05 v1(2609.64,5346.06)
IO_4_0: pad.1@2993.12,1950.32 U4.45 | length 15672.3
  Top Layer w10: U4.45 2713.57,5997.63 2988.78,6272.82 3134.05,6272.82 3157.67,6249.2 v1(3928.54,6249.2) ; pad.1@2993.11,1950.35 3012.3,1950.35 3144.31,2082.25 3303.31,2082.25 3392.3,2171.25 8070.31,2171.25 8207.31,2308.25 8207.31,2719.64 8113.56,2813.38 8113.56,3021.65 8249.4,3159.05 8249.4,3286.22 8267.11,3303.93 8302.93,3303.93 8340.73,3341.73 8340.73,3411.81 8250.57,3501.97 8250.57,3955.11 8299.4,4003.93 8321.84,4003.93 8384.43,4066.53 8384.43,4209.05 8338.76,4254.72 8299.39,4254.72 8274.19,4279.91 8274.19,4748.81 8306.48,4781.1 8339.94,4781.1 8372.23,4813.38 8372.23,4911.41 8327.34,4956.29 8297.03,4956.29 8274.19,4979.13 8274.19,5071.25 8185.22,5160.23 v1(8157.66,5160.23) ; v1(6168.71,5565.75) 6228.95,5505.5 6286.4,5505.5 6607.66,5184.24 6752.55,5184.24 6954.12,4982.67 7283.25,4982.67 7284.83,4981.1 v1(7890.73,4981.1)
  Bottom Layer w10: v1@3928.51,6249.25 4264.81,6249.25 4517.51,5996.45 5413.21,5996.45 5494.31,6077.55 5899.01,6077.55 5982.51,5994.05 6061.61,5994.05 6110.41,5945.25 6110.41,5891.35 6109.21,5890.15 6109.21,5625.15 v1(6168.71,5565.75) ; v1(7890.73,4981.1) 8094.31,4981.05 8157.71,5044.45 v1@8157.71,5160.25
IO_4_1: U4.47 U116.1 | length 14686.3
  Top Layer w10: U4.47 2674.2,5990.54 2980.9,6297.23 3143.5,6297.23 3165.15,6275.58 v1(3981.68,6275.58) v1@3980.11,6274 ; U116.1@3634.8,2317.25 3742.61,2209.45 8054.11,2209.45 8144.31,2299.65 8144.31,2561.05 8152.54,2569.29 8152.54,2741.73 8092.31,2801.97 8092.31,3033.46 8230.89,3172.04 8230.89,3966.14 8292.31,4027.55 8315.14,4027.55 8365.14,4077.55 8365.14,4198.03 8327.74,4235.43 8290.73,4235.43 8254.9,4271.26 8254.9,4764.56 8293.1,4802.75 8335.62,4802.75 8350.18,4817.31 8350.18,4903.14 8324.19,4929.13 8266.32,4929.13 8248.6,4946.84 8248.6,5051.96 8202.93,5097.63 v1(8127.74,5097.63) ; v1(6256.88,5568.58) 6612.47,5212.98 6762.39,5212.98 6950.18,5025.19 v1(7973.02,5025.19)
  Bottom Layer w10: v1(3981.68,6275.58) 3983.31,6277.15 4269.11,6277.15 4524.21,6022.05 5412.81,6022.05 5490.71,6099.95 5901.81,6099.95 5986.41,6015.35 6069.11,6015.35 6132.11,5952.35 6132.11,5635.05 6169.91,5598.85 6226.61,5598.85 v1(6256.88,5568.58) v1@6256.88,5567.31 ; v1(7973.02,5025.19) 8045.46,5097.63 v1(8127.74,5097.63)
IO_4_2: U4.48 U115.1 | length 14259.6
  Top Layer w10: U4.48@2654.51,5542.55 2654.51,6005.85 2969.11,6320.45 3149.01,6320.45 3165.11,6304.35 v1(4030.11,6304.32) ; v1(4029.32,6477.15) 5054.91,6477.15 5062.41,6484.65 5062.41,6535.05 5115.91,6588.55 5193.11,6588.55 5238.41,6543.25 5238.41,6410.25 5521.91,6126.75 6108.51,6126.75 6288.01,5947.25 7705.31,5947.25 7954.51,5698.05 7972.61,5698.05 7977.31,5693.25 8107.71,5693.25 8155.71,5645.25 8155.71,5571.65 8107.71,5523.65 8032.11,5523.65 8017.91,5509.45 8017.91,5434.25 8029.71,5422.45 8156.91,5422.45 8180.51,5398.85 8180.51,5365.35 8152.91,5337.75 8111.61,5337.75 8080.51,5306.65 8080.51,5066.15 8216.31,4930.35 8216.31,4018.85 8183.61,3986.25 8183.61,3820.45 8119.51,3756.25 8063.61,3756.25 8017.91,3710.65 8017.91,3484.25 8039.51,3462.55 8118.31,3462.55 8166.31,3414.55 8166.31,3303.95 8143.51,3281.05 8085.21,3281.05 8028.91,3224.75 8028.91,2864.15 7956.51,2791.75 7956.51,2292.55 7904.91,2240.95 4924.31,2240.95 U115.1
  Bottom Layer w10: v1(4029.32,6477.15) v1@4030.11,6304.35
IO_4_3: U4.49 U132.1 | length 12939.3
  Top Layer w10: U4.49@2634.81,5542.55 2634.81,6027.15 2957.31,6349.55 3160.81,6349.55 3180.91,6329.55 v1@4075.01,6329.55 ; v1(5417.9,6312.98) 5417.91,6268.45 5537.21,6149.25 6118.71,6149.25 6297.81,5970.05 7717.51,5970.05 7961.61,5725.95 8111.21,5725.95 8173.81,5663.35 8173.81,5460.65 8217.91,5416.55 8217.91,5346.45 8192.31,5320.85 8130.11,5320.85 8101.81,5292.55 8101.81,5074.05 8102.91,5072.85 8104.51,5072.85 8232.51,4944.85 8232.51,4256.65 8285.61,4203.55 8328.11,4203.55 8341.91,4189.75 8341.91,4084.65 8307.31,4049.95 8281.71,4049.95 8205.71,3974.05 8205.71,3174.05 8069.91,3038.15 8069.91,2796.85 7987.21,2714.15 7987.21,2522.05 8019.11,2490.15 8019.11,2266.95 v1@8013.61,2261.45 ; U132.1 6140.69,2272.44 7862.39,2272.44 v1(7932.47,2342.52)
  Bottom Layer w10: v1(4073.01,6329.95) 4085.61,6329.95 4102.21,6313.35 v1@5417.91,6313.35 ; v1(7932.47,2342.52) v1(8013.57,2261.42) v1@8013.57,2258.66
IO_4_4: U4.50 U131.1 | length 11647.1
  Top Layer w10: U4.50@2615.11,5542.55 2615.11,6035.85 2955.71,6376.35 3167.91,6376.35 3190.01,6354.35 v1(4120.71,6354.35) ; v1@4119.91,6442.95 5164.41,6442.95 5502.91,6104.35 6093.51,6104.35 6277.71,5920.05 7693.51,5920.05 7987.61,5625.95 7987.61,5465.75 7991.11,5462.15 7991.11,5398.85 8057.71,5332.25 8057.71,5064.15 8197.41,4924.45 8197.41,4029.95 8163.21,3995.65 8163.21,3827.15 8109.61,3773.65 8051.81,3773.65 7993.51,3716.95 v1@7993.51,2879.95 ; U131.1@6375.01,2627.55 6689.51,2312.95 7689.21,2312.95 7745.11,2368.85 7745.11,2824.75 7801.41,2881.05 v1(7880.1,2881.1)
  Bottom Layer w10: v1(4120.71,6354.35) v1(4121.01,6442.95) ; v1(7880.1,2881.1) 7881.28,2879.92 v1(7993.49,2879.92)
IO_4_5: U4.52 U130.1 | length 10502.7
  Top Layer w10: U4.52@2575.81,5542.55 2575.81,5621.65 2595.11,5640.95 2595.11,6040.95 2955.31,6401.15 3173.81,6401.15 3193.91,6381.05 5143.11,6381.05 5465.11,6059.05 6061.61,6059.05 6252.91,5867.75 7676.21,5867.75 7938.01,5605.85 7938.01,5382.65 8008.41,5312.15 8008.41,5053.15 8151.41,4910.15 8151.41,4062.95 8117.91,4029.55 8117.91,3849.25 8086.81,3817.75 8032.91,3817.75 7936.81,3721.65 7936.81,3180.75 7718.31,2962.25 7718.31,2390.95 7676.91,2349.95 7443.91,2349.95 7322.31,2471.65 U130.1@7125.01,2471.65
IO_4_6: U4.53 U133.1 | length 9947.4
  Top Layer w10: U4.53@2556.11,5542.55 2556.11,5635.45 2576.21,5655.55 2576.21,6054.35 2941.91,6420.05 3183.31,6420.05 3199.81,6403.55 5165.11,6403.55 5486.41,6082.25 6082.91,6082.25 6267.51,5897.65 7682.51,5897.65 7967.51,5612.55 7967.51,5393.65 8034.41,5326.75 8034.41,5064.15 8178.51,4920.05 8178.51,4041.75 8141.51,4004.75 8141.51,3838.15 8093.51,3790.15 8089.91,3793.65 8041.51,3793.65 7964.01,3716.15 7964.01,3119.25 7925.41,3080.75 7925.41,2771.65 7890.71,2737.05 7800.21,2737.05 7772.21,2709.05 7772.21,2531.45 7825.41,2478.35 7867.11,2478.35 U133.1
IO_4_7: H26.5 U4.54 | length 1003.1
  Top Layer w10: v1(2532.08,5436.21) 2536.41,5440.53 U4.54
  Bottom Layer w10: H26.5 2551.37,5738.57 2551.37,5455.5 v1(2532.08,5436.21)
OE_PCA: R14.1 U4.30 | length 971.1
  Top Layer w10: v1(2400.19,5312.59) R14.1 ; v1(2985.23,5466.13) 3008.85,5489.74 U4.30@3008.85,5542.51
  Bottom Layer w10: v1(2400.19,5312.59) 2447.83,5264.95 2991.14,5264.95 3031.29,5305.11 3031.29,5420.07 v1(2985.23,5466.13)
P1_1: H11.4 P1.1 | length 100.1
  Top Layer w10: P1.1 1945.86,4339.36 H11.4
RESET_PCA: R13.1 U4.56 | length 108.6
  Top Layer w10: R13.1 2462,5473.22 2497.04,5508.25 U4.56
S$60765: 
S$91134: 
S$91138: 
S$111825:  | length 37.3
  Top Layer w10: 6038.38,3621.65 6064.77,3595.26
S$112762: 
SCL_PCA: H11.3 H17.2 H23.2 R12.1 U4.2 | length 8782.3
  Top Layer w10: H17.2 1999.41,5803.14 2189.96,5803.14 2310.03,5683.06 v1(2310.03,5653.93) ; H11.3 2198.22,4593.3 2198.22,4822.83 2335.23,4959.84 R12.1 ; U4.2 2516.73,5179.92 2352.95,5016.14 R12.1 ; U4.2@2516.73,5267.25 2516.73,5333.86 v1(2524.99,5342.12) ; H23.2@7493.91,5234.65 7377.31,5351.15 7377.31,5458.25 7339.91,5495.65 7210.81,5495.65 7176.21,5461.05 7176.21,5420.85 7156.1,5400.75 7078.91,5400.75 6822.61,5657.05 6477.31,5657.05 6394.71,5574.45 6353.31,5574.45 6248.21,5679.55 6248.21,5755.55 6215.9,5787.75 5698.6,5787.75 5591.9,5681.05 5019.11,5681.05 4917.1,5579.15 4710.41,5579.15 4365.11,5924.35 3880.51,5924.35 3764.41,5808.25 3764.41,5433.85 3796.61,5401.55 3835.2,5401.55 3863.21,5373.65 3863.21,5309.85 3827.01,5273.65 3791.1,5273.65 3759.2,5241.75 3759.2,5080.35 3644.2,4965.35 2911.21,4965.35 2861.61,5014.95 2641.91,5014.95 2608.84,5048.02 v1(2575.78,5048.02) 2543.89,5016.14 R12.1
  Bottom Layer w10: v1(2310.03,5653.93) 2436.02,5527.94 2436.02,5451.96 2524.99,5362.98 v1@2524.99,5337
SDA_PCA: H11.2 H17.1 H23.1 R11.1 U4.1 | length 8224.1
  Top Layer w10: H17.1 2091.53,5607.86 v1(2278.14,5607.86) ; H11.2 2088.78,4539.36 2174.21,4624.8 2174.21,4838.57 2173.03,4839.76 2297.01,4963.74 2297.01,5070.85 R11.1@2319.31,5093.15 ; R11.1@2335.24,5111.75 2335.24,5138.57 v1(2402.16,5205.5) ; v1@2402.21,5205.55 2484.01,5205.55 2497.01,5218.45 U4.1 ; v1(3079.32,5233.06) 3102.16,5233.06 3158.46,5289.36 3158.46,5376.76 v1(3159.64,5377.94) ; v1(5305.7,5566.13) 5502.94,5566.13 5706.88,5770.07 6197.82,5770.07 6221.84,5746.05 6221.84,5659.05 6330.89,5549.99 6411.21,5549.99 6491.13,5629.91 6756.48,5629.91 7197.82,5188.57 7547.82,5188.57 H23.1
  Bottom Layer w10: v1(2278.14,5607.86) 2278.14,5329.52 v1(2402.16,5205.5) ; v1(2402.16,5205.5) 2402.21,5122.85 2449.51,5075.55 2490.01,5075.55 2538.01,5123.65 2563.61,5123.65 2650.21,5210.25 3056.51,5210.25 v1(3079.32,5233.06) ; v1(3159.64,5377.94) 3159.64,5413.77 3174.21,5428.34 3447.83,5428.34 3476.96,5399.2 3476.96,5272.43 3522.24,5227.16 3660.03,5227.16 3702.55,5184.64 3994.28,5184.64 4194.68,5385.03 4194.68,5442.9 4249.8,5498.02 4383.65,5498.02 4416.72,5464.95 4856.75,5464.95 4942.71,5550.91 4942.71,5627.55 4988.77,5673.61 5198.22,5673.61 v1(5305.7,5566.13)
VDD_PCA: C5.1 C6.1 H11.5 H18.3 H24.3 H26.7 R11.2 R12.2 R13.2 R14.2 R15.2 U4.18 U4.46 | length 12416
  Top Layer w10: H26.7 1934.84,6151.96 1882.87,6099.99 1882.87,4681.1 1886.81,4677.16 1886.81,4301.17 1910.82,4277.16 2006.49,4277.16 H11.5 ; H18.3 2037.6,5314.56 R11.2 ; R12.2 R11.2 ; R13.2 C6.1@2423.48,5538.23 ; R13.2@2358.51,5473.25 2358.81,5312.55 2303.31,5312.55 2256.51,5265.75 R11.2 ; v1(2587.2,5389.36) 2604.12,5389.36 v1(2693.11,5478.35) U4.46@2693.91,5542.55 ; v1(2804.52,5321.25) 2831.69,5294.08 U4.18 ; v1(3001.77,5363.77) 3006.49,5368.5 C5.1 ; 3009.25,5885.03 3054.99,5885.03 v1(3057.71,5887.75) 3059.24,5886.22 3185.62,5886.22 ; 3185.61,5886.25 3378.91,5887.05 ; v1(4087.98,5316.92) 4308.46,5316.92 v1(4397.04,5228.34)
  Bottom Layer w10: H18.3 1897.04,5394.09 1897.04,6090.94 1937.99,6131.88 H26.7 2004.13,6218.1 2044.29,6218.1 2093.11,6169.28 2093.11,5923.22 2491.53,5524.8 2491.53,5433.85 2530.11,5395.27 2581.3,5395.27 v1(2587.2,5389.36) ; v1@2804.52,5325.98 v1(2804.52,5321.25) 2834.44,5291.33 2929.33,5291.33 v1(3001.77,5363.77) 3001.77,5409.84 2930.11,5481.49 2696.24,5481.49 v1(2693.11,5478.35) 2692.31,5611.85 2968.31,5887.75 v1(3057.71,5887.75) 3544.71,5887.75 3946.61,5485.85 3946.61,5294.05 3976.21,5264.55 4035.61,5264.55 v1@4088.01,5316.95 ; v1(4397.04,5228.34) 4427.35,5258.65 5606.88,5258.65 5770.26,5095.27 6018.69,5095.27 6025.38,5101.96 7611.6,5101.96 H24.3
VSS_PCA: C5.2 C6.2 H11.1 H17.3 H18.2 H23.3 H24.2 H26.6 pad.2@3204.94,1977.15 U4.6 U4.11 U4.23 U4.34 U4.39 U4.51 U96.2 U97.2 U99.2 U106.2 U107.2 U108.2 U109.2 U110.2 U111.2 U112.2 U113.2 U114.2 U115.2 U116.2 U118.2 U119.2 U120.2 U121.2 U122.2 U123.2 U124.2 U125.2 U126.2 U127.2 U128.2 U129.2 U130.2 U131.2 U132.2 U133.2 U134.2 U135.2 U136.2 U137.2 | length 38312.9
  Top Layer w10: 1908.81,5304.68 1908.81,4774.85 H11.1 ; H18.2 1958.11,5214.55 1908.81,5263.75 1908.81,5450.75 ; v1@2300.19,5221.65 v1(2303.34,5221.65) 2315.55,5233.85 2445.82,5233.85 2473.03,5261.05 2473.03,5325.16 2559.64,5411.77 ; C6.2 2009.61,5549.95 1908.81,5450.75 ; C6.2 2355.7,5721.65 2175.78,5901.57 H17.3 1908.81,5812.54 1908.81,5450.75 ; U4.51 2595.47,5498.81 2559.64,5462.98 2559.64,5326.77 2595.07,5291.33 2595.07,5249.2 2595.07,5287.79 2616.33,5307.47 2680.9,5307.47 ; U4.11 2693.89,5294.49 2680.9,5307.47 ; 2831.31,5469.25 2680.91,5318.85 2680.91,5307.45 ; U4.39@2831.3,5540.55 2831.3,5388.17 2846.25,5373.22 2900.98,5373.22 2930.11,5402.35 U4.34 ; v1(2915.55,5627.16) 2930.11,5612.59 U4.34 ; U4.23@2929.72,5249.2 2930.11,5249.59 U4.34 ; 2929.71,5390.85 2955.41,5416.55 2976.21,5416.55 3006.91,5447.25 C5.2@3097.81,5447.25 ; v1(3111.22,5822.83) 3109.25,5824.79 3091.92,5824.79 3067.52,5800.39 3067.52,5762.98 3067.52,5736.99 3116.73,5687.79 3403.34,5687.79 3436.02,5720.47 3436.02,5763.77 3480.9,5718.89 3480.9,5298.81 3580.51,5199.2 U99.2 ; 3247.05,5762.98 3322.24,5687.79 3361.01,5687.79
  Bottom Layer w10: H17.3 1997.83,6111.8 H26.6 ; v1(2184.05,5550.39) 2184.05,5340.94 v1(2303.34,5221.65) ; U97.2 3583.64,2616.12 3853.34,2885.82 4078.97,2885.82 U114.2 4332.44,3134.64 4767.12,3134.64 4926.53,3294.05 U96.2 5982.51,3293.65 ; v1(2915.55,5627.16) v1(3111.22,5822.83) v1@3112.79,5822.83 ; pad.2@3204.93,1977.15 3479.74,1977.15 U116.2 4801.29,2344.08 U115.2 5572.94,2449.48 U132.2 ; U113.2 3476.59,3031.08 U112.2 4919.09,3883.03 U111.2 5666.72,4040.9 U118.2 ; U110.2 3893.89,4198.38 U109.2 4917.12,4632.24 U108.2 5669.08,4790.9 U121.2 ; U99.2 4053.34,5102.71 U106.2 4917.12,5378.3 5076.56,5537.75 5669.08,5537.75 ; 5578.16,2454.7 6481.7,2454.7 U131.2 ; 5666.72,4041.3 U119.2 6730.89,3883.03 U120.2 ; 5672.93,4794.75 6568.39,4794.75 U122.2 6731.29,4631.85 U123.2 8067.11,4631.85 U136.2 8068.69,4622.43 8205.3,4485.82 8205.3,3996.45 ; U126.2 5669.08,5537.75 ; U129.2 5982.47,3293.66 U128.2 6729.71,3136.97 U127.2 7321.84,3135.39 U134.2 ; 6491.13,2456.69 6558.88,2388.94 U130.2 8068.29,2388.94 U133.2 ; U120.2@7322.21,3883.05 U137.2@8071.41,3882.65 ; H23.3 7393.88,5309.01 U124.2 ; 7676.93,5380.66 7701.4,5380.66 H24.2 ; U133.2@8069.51,2390.15 8343.11,2390.15 8370.61,2417.75 8370.61,3134.65 ; U134.2 8370.61,3134.65 ; U137.2 8185.26,3996.45 8205.3,3996.45 ; 8211.2,4397.63 8211.2,5260.62 8093.13,5378.69 U135.2 8068.68,5380.66 U124.2 ; 5669.08,5537.75 6572.62,5537.75 6729.71,5380.66 U124.2 ; 8205.3,3996.45 8370.61,3831.14 8370.61,3134.65
  other v1: 7845.46,2788.58 7831.28,2995.27 7754.91,4125.59 8250.97,4188.18 2419.88,5043.3 2443.89,5173.22 6988.77,5537 3024.99,5637.39 6444.28,5696.05 7747.03,5713.38 2327.36,5815.74 3511.61,5933.85 5132.47,6181.09 4671.45,6201.56
pads on no net: U96. U97. U99. U106. U107. U108. U109. U110. U111. U112. U113. U114. U115. U116. U118. U119. U120. U121. U122. U123. U124. U125. U126. U127. U128. U129. U130. U131. U132. U133. U134. U135. U136. U137.

## Polygon pours and split planes (outlines as drawn)
VSS_PCA on Top Layer (solid): 1613.97,6681.88 8712.78,6717.71 8679.71,6327.55 8865.53,1795.28 8825.38,1500 1582.48,1557.09
VSS_PCA on Bottom Layer (solid): 1500,6807.47 1537.01,6770.46 8648.41,6770.46 8703.92,6714.95 8703.92,2048.43 8638.37,1514.17 1501.77,1514.17

## Silkscreen, mask and mechanical layers (free items; w line width, h text height)
Top Overlay:
  circle w10: c2821.06,4426.76 r157.48
  lines w10: 2628.04,2287.39 3224.71,2631.88 3549.52,2069.3 ; 2269.88,4127.55 2269.88,4725.98 2494.29,4725.98 2494.29,4918.89 3136.02,4918.89 3136.02,3934.64 2494.29,3934.64 2494.29,4127.55 2269.88,4127.55 ; 2545.47,4151.18 3096.65,4151.18 3096.65,4702.36 2545.47,4702.36 2545.47,4151.18 ; 2717.69,2277.78 3188.21,2549.43 3459.87,2078.91 2989.35,1807.26 2717.69,2277.78 ; 2876.57,2337.23 3057.28,2441.56 3121.25,2330.75 2940.55,2226.42 2876.57,2337.23
  lines w10 net S$91134: 2554.15,5597.42 2950.61,5597.42
  lines w10 net S$91138: 5303.34,2129.92 5359.01,2185.59 6439.16,2171.26 6494.84,2226.93
  text "proudly & painfully" at 2683.66,6353.93 h118.11
  text "yeah sorry the addr cheat sheet is on the other board" at 5315.15,6353.93 h118.11
  text "3V3" at 1998.63,6226.37 h59.05 r90
  text "VSS" at 2104.13,6225.58 h59.05 r90
  text "io_2_7" at 2393.48,6223.37 h59.05 r88
  text "io_1_7" at 2496.58,6222.34 h59.05 r86
  text "io_4_7" at 2192.07,6220.62 h59.05 r78
  text "io_3_7" at 2290.46,6221.47 h59.05 r82
  text "io_0_7" at 2600.18,6221 h59.05 r88
  text "designed in France*" at 2843.89,6195.27 h118.11
  text "(but made in China)" at 3784.05,6127.94 h47.24
  text "(still, assembled in France)" at 4101.37,6082.27 h29.53
  text "1" at 3178.14,5939.76 h39.37 r180
  text "1" at 3366.73,5937.79 h39.37 r180
  text "1" at 3004.52,5933.85 h39.37 r180
  text "VSS" at 2058.07,5845.27 h59.05
  text "0" at 3090.35,5761.8 h39.37 r180
  text "0" at 3272.24,5761.02 h39.37 r180
  text "0" at 3468.3,5759.83 h39.37 r180
  text "SCL" at 2064.37,5740.14 h59.05
  text "A1" at 3175.65,5677.58 h39.37 r69
  text "A0" at 2972.24,5667.71 h39.37
  text "A2" at 3353.24,5668.1 h39.37
  text "SDA" at 2068.31,5636.21 h59.05
  text "RIGHT V0" at 2566.73,5586.21 h59.05
  text "VSS" at 7348.21,5282.67 h31.5
  text "SDA" at 7558.06,5283.06 h31.5
  text "5V" at 7923.02,5281.88 h31.5
  text "SCL" at 7457.27,5281.09 h31.5
  text "VSS" at 7806.09,5280.7 h31.5
  text "3V3" at 7700.97,5279.91 h31.5
  text "3V3" at 2038.38,5253.53 h59.05
  text "VSS" at 2038.78,5144.48 h59.05
  text "5V" at 2040.74,5050.39 h59.05
  text "oh hell yeah you know" at 1946.65,3776.37 h118.11
  text "it's a fucking TRACKBALL" at 1893.5,3636.22 h118.11
  text "AV-RK MK II" at 5375.78,1948.42 h118.11
Bottom Overlay:
  circle w10: c6579.71,4641.73 r61.57
  circle w10: c6564.75,4674.8 r21.84
  circle w10: c5779.71,4678.73 r62.86
  circle w10: c5793.89,4700.78 r21.16
  text "github.com/avmolaei/AV-RK-MK2" at 8354.51,6150.78 h196.85 r359
  text "All along the watchtower - Jimi Hendrix" at 8347.82,3038.97 h196.85
  text "1:19" at 7254.91,2781.49 h196.85 r1